# EAGLE board VM_Motor_v2.3 (EAGLE 7.0.0)
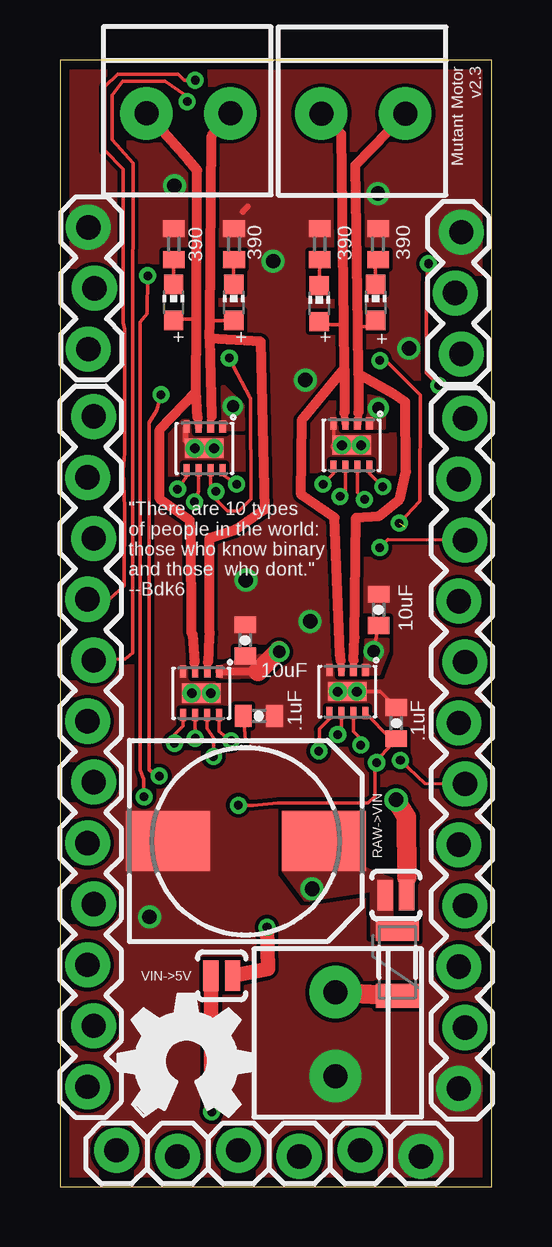
[diagram p0: board, top side]
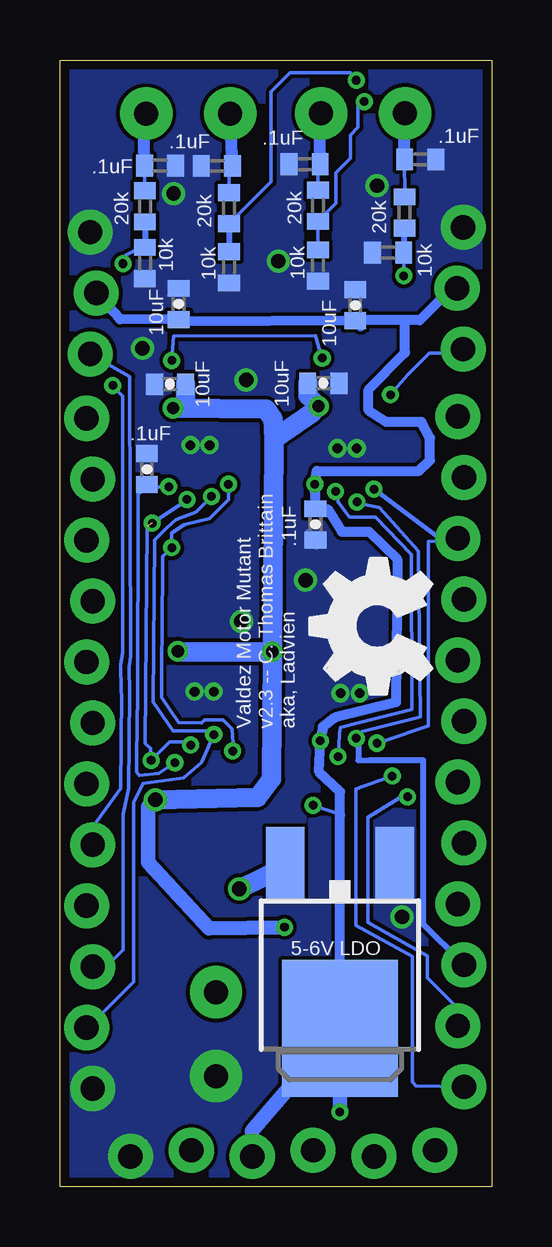
[diagram p1: board, bottom side, seen from below]

Size 18 x 46.97 mm. Coordinates in mm from the lower left corner, seen from the top.
Outline: 0,0 18,0 18,46.97 0,46.97 0,0
Copper layers (1*16): Top 0.0356mm / dielectric 1.5011mm / Bottom 0.0356mm
Design rules "LaenPCBOrder *": minimum track width 6mil, minimum drill 13mil, track to track 6mil, track to pad 6mil, pad to pad 6mil, via to via 6mil, smd to smd 6mil, copper to edge 15mil, drill to drill 6mil, minimum pad ring 7mil, minimum via ring 7mil, stop-mask expansion 3mil, vias tented up to drill 24mil, thermal gap 10mil

## Footprints (pad centres in the part's own frame; a part is rotated, then mirrored left to right if it is on the bottom)
0402-CAP = smd 0.7 x 0.9: 1 -0.65,0; 2 0.65,0
C0402 = smd 0.7 x 0.9: 1 -0.65,0; 2 0.65,0
150CLZ-0810 = smd 3.5 x 2.5: + 3.25,0; - -3.25,0
PTC-1206 = smd 1 x 1.8: 1 -1.4,0; 2 1.4,0
TERMBLOCK_1X2-3.5MM = drill 1 pad 2.184: 1 1.8,0; 2 -1.7,0
1X12_LOCK = drill 1.016 pad 1.88: 1 0,0.127; 2 2.54,-0.127; 3 5.08,0.127; 4 7.62,-0.127; 5 10.16,0.127; 6 12.7,-0.127; 7 15.24,0.127; 8 17.78,-0.127; 9 20.32,0.127; 10 22.86,-0.127; 11 25.4,0.127; 12 27.94,-0.127
1X06_LOCK = drill 1.016 pad 1.88: 1 0,0; 2 2.54,-0.254; 3 5.08,0; 4 7.62,-0.254; 5 10.16,0; 6 12.7,-0.254
1X03_LOCK = drill 1.016 pad 1.88: 1 0,0.127; 2 2.54,-0.127; 3 5.08,0.127
CHIP-LED0603 = smd 0.8 x 0.8: A 0,-0.75; C 0,0.75
R0402 = smd 0.7 x 0.9: 1 -0.65,0; 2 0.65,0
SJ_2S-NO = smd 0.635 x 1.27: 1 -0.45,0; 2 0.45,0
DPAK = smd 1.6 x 3: 1 -2.28,-5.31; 3 2.28,-5.31 | smd 4.826 x 5.715: 4 0,1.588
QFN8 = smd 0.28 x 0.5: P$1 -0.75,-0.9; P$2 -0.25,-0.9 | smd 0.25 x 0.5: P$3 0.25,-0.9; P$4 0.75,-0.9; P$5 0.75,0.9; P$6 0.25,0.9; P$7 -0.25,0.9; P$8 -0.75,0.9 | smd 1.6 x 0.8: P$9 0,0 | drill 0.4 pad 0.6: P$10 0.4,0; P$11 -0.4,0

## Placement (x,y rotation side)
C1  .1uF  [0402-CAP]  8.3,19.63 0 top
C2  .1uF  [0402-CAP]  14.03,19.32 90 top
C3  100nF  [C0402]  13.82,42.57 0 bottom
C4  100nF  [C0402]  11.45,42.55 180 bottom
C5  100nF  [C0402]  7.79,42.63 180 bottom
C6  100nF  [C0402]  2.98,42.82 0 bottom
C7  1000uF  [150CLZ-0810]  7.75,14.41 0 top
C8  .1uF  [0402-CAP]  7.35,27.61 270 bottom
C10  10uF  [0402-CAP]  7.73,22.78 90 top
C11  10uF  [0402-CAP]  13.29,24.05 90 top
C13  10uF  [0402-CAP]  5.68,36.75 90 bottom
C14  10uF  [0402-CAP]  13.05,36.8 90 bottom
C16  10uF  [0402-CAP]  7.01,33.5 0 bottom
C17  .1uF  [0402-CAP]  14.37,29.92 90 bottom
C20  10uF  [0402-CAP]  13.41,33.46 180 bottom
F1  PTCSMD  [PTC-1206]  14.07,9.36 90 top
FRAME1  FRAME-LEDGER  [CREATIVE_COMMONS]  20.82,-8.55 0 top  (outside the outline)
J1  [TERMBLOCK_1X2-3.5MM]  12.7,44.74 180 top
J3  [TERMBLOCK_1X2-3.5MM]  11.49,6.31 90 top
J4  [TERMBLOCK_1X2-3.5MM]  5.41,44.75 180 top
JP1  M12LOCK  [1X12_LOCK]  1.28,4.17 90 top
JP2  M12LOCK  [1X12_LOCK]  16.76,4.09 90 top
JP3  [1X06_LOCK]  2.36,1.52 0 top
JP4  [1X03_LOCK]  1.31,34.92 90 top
JP5  [1X03_LOCK]  16.61,39.8 270 top
LED1  BLUE  [CHIP-LED0603]  7.25,36.87 0 top
LED2  GREEN  [CHIP-LED0603]  4.74,36.87 0 top
LED3  BLUE  [CHIP-LED0603]  13.17,36.87 0 top
LED4  GREEN  [CHIP-LED0603]  10.81,36.82 0 top
R1  390  [R0402]  7.26,39.29 270 top
R2  390  [R0402]  4.75,39.29 270 top
R3  390  [R0402]  13.27,39.29 270 top
R4  390  [R0402]  10.83,39.29 270 top
R5  20k  [R0402]  7.24,40.89 90 bottom
R6  10k  [R0402]  7.24,38.4 90 bottom
R7  20k  [R0402]  3.63,40.61 90 bottom
R8  10k  [R0402]  4.32,38.94 0 bottom
R9  20k  [R0402]  14.45,40.87 90 bottom
R10  10k  [R0402]  14.45,38.51 90 bottom
R11  20k  [R0402]  10.95,40.79 90 bottom
R12  10k  [R0402]  10.95,38.33 90 bottom
RAW->VIN  SOLDERJUMPERNO  [SJ_2S-NO]  14.01,12.16 0 top
U1  V_REG_MC33269DT  [DPAK]  6.32,8.19 180 bottom
U$1  DRV8837  [QFN8]  5.89,20.57 180 top
U$2  DRV8837  [QFN8]  6.03,30.78 180 top
U$3  DRV8837  [QFN8]  12.16,30.91 180 top
U$4  DRV8837  [QFN8]  11.99,20.64 180 top
U$6  [OSHW_FILLX200_NOTEXT]  2.43,2.95 0 top
U$7  [OSHW_FILLX200_NOTEXT]  2.49,20.53 90 bottom
VIN->5V  SOLDERJUMPERNO  [SJ_2S-NO]  6.75,8.8 0 top

## Library data of the parts
C1 C2 C8 C10 C11 C13 C14 C16 C17 C20 = SparkFun-Capacitors
C3-C7 R1-R12 = resistor
F1 = SparkFun-PowerIC; PROD_ID: RES-11150
FRAME1 = SparkFun-Aesthetics
J1 J3 J4 = microbuilder
JP1-JP5 = SparkFun-Connectors
LED1-LED4 = led
RAW->VIN VIN->5V = SparkFun-Retired
U1 = SparkFun-PowerIC
U$1-U$4 = bt_motordriver
U$6 U$7 = ohw-logo

## Nets
+5V: C1.1 C2.1 C8.1 C13.1 C14.1 C17.1 JP3.4 JP4.2 JP5.2 U1.4 U$1.P$8 U$2.P$8 U$3.P$8 U$4.P$8 VIN->5V.1
CTS_RES: JP3.5
DTR_SEL: JP3.1
GND: C1.2 C2.2 C3.2 C4.2 C5.2 C6.2 C7.- C8.2 C10.2 C11.2 C13.2 C14.2 C16.2 C17.2 C20.2 J3.2 JP2.1 JP3.6 JP4.3 JP5.1 R1.1 R2.1 R3.1 R4.1 R6.1 R8.1 R10.1 R12.1 U1.1 U$1.P$4 U$1.P$9 U$1.P$10 U$1.P$11 U$2.P$4 U$2.P$9 U$2.P$10 U$2.P$11 U$3.P$4 U$3.P$9 U$3.P$10 U$3.P$11 U$4.P$4 U$4.P$9 U$4.P$10 U$4.P$11
HM-RX: JP2.12
HM-TX: JP2.11
IO20: JP2.8
IO_02: JP2.9
IO_05-SDA: JP1.11
IO_06: JP1.7
IO_07: JP1.6
IO_08: JP1.5
IO_08-SCL: JP1.12
IO_09: JP1.4
IO_10: JP1.8 R5.1 R6.2
IO_011: JP1.1 JP4.1
IO_11: JP1.9 R11.1 R12.2
IO_13: JP2.3 JP5.3
IO_14: JP2.4
IO_15: JP2.7
IO_110: JP1.2 R7.1 R8.2
IO_111: JP2.5 R9.1 R10.2
MOTOR1_DIR: JP1.10 U$1.P$5 U$2.P$5
MOTOR1_PWM: JP1.3 U$1.P$6 U$2.P$6
MOTOR2_DIR: JP2.10 U$3.P$5 U$4.P$5
MOTOR2_PWM: JP2.2 U$3.P$6 U$4.P$6
MOUT1_A: C5.1 J4.2 LED1.A R5.2 U$1.P$2 U$2.P$2
MOUT1_B: C6.1 J4.1 LED2.A R7.2 U$1.P$3 U$2.P$3
MOUT2_A: C3.1 J1.2 LED3.A R9.2 U$3.P$2 U$4.P$2
MOUT2_B: C4.1 J1.1 LED4.A R11.2 U$3.P$3 U$4.P$3
N$1: LED2.C R2.2
N$2: LED4.C R4.2
N$3: LED1.C R1.2
N$4: LED3.C R3.2
N$13: F1.1 J3.1
RAW: C7.+ F1.2 RAW->VIN.1 U1.3
RX: JP3.3
SLEEP: JP2.6 U$1.P$7 U$2.P$7 U$3.P$7 U$4.P$7
TX: JP3.2
VIN: C10.1 C11.1 C16.1 C20.1 RAW->VIN.2 U$1.P$1 U$2.P$1 U$3.P$1 U$4.P$1 VIN->5V.2

## Tracks (layer width: path | path; a pad name or v marks a point on that pad's centre or on a via)
+5V  (via drill 0.36, 0.36 pad 0.36)
  Top 0.152: U$2.P$8 6.78,29.7 v7.37,29.29 | U$3.P$8 12.91,29.74 v13.46,29.18 | U$1.P$8 6.64,18.98 v7.14,18.59 7.73,18.59 C1.1 | U$4.P$8 13.81,18.68 C2.1 13.41,17.98 v13.21,17.68 13.13,17.58 13.13,16.28 12.85,16 9.09,16 8.05,15.9 v7.44,15.9
  Top 0.61: VIN->5V.1 6.3,3.15 v6.33,3.12
  Bottom 0.152: v7.37,29.29 7.16,29.29 | v7.37,29.29 7.37,29.06 | v7.37,29.29 7.37,28.98 | 14.53,29.17 C17.1 14.73,28.86 14.76,19.91 14.78,19.84 14.81,17.3 14.71,17.14 13.89,17.22 v13.21,17.68 | 14.53,29.17 14.7,29.17 | 14.53,29.17 13.48,29.17 v13.46,29.18 | v7.37,29.29 7.37,28.27 7.32,28.22 6.83,28.25 | JP4.2 1.66,37.46 | 5.67,36.12 C13.1 | 12.74,36.07 C14.1 | 7.39,29.26 v7.37,29.29 | v7.44,15.9 6.37,15.54 6.32,15.49
  Bottom 0.406: U1.4 6.32,15.49 6.32,16.48 7.19,17.3 v7.14,18.59 7.14,18.67 7.04,19.18 6.53,19.56 3.99,20.19 3.94,26.16 5.11,27.3 6.25,27.3 6.83,28.25 | 7.37,28.98 C8.1 | 1.66,37.46 3,36.12 3.61,36.12 | 3.61,36.12 5.67,36.12 | 12.74,36.07 C13.1 5.46,35.88 | C14.1 15.49,36.16 JP5.2 | 7.39,29.26 7.29,29.84 3.02,29.84 2.56,30.28 2.56,31.22 2.92,31.88 4.39,31.88 5.13,32.36 5.13,33.22 3.63,34.75 3.61,34.77 3.61,36.12
  Bottom 0.61: JP3.4 9.98,2.33 U1.4 v6.33,3.12
GND  (via drill 0.6)
  Top 0.152: 13.97,20.19 14.03,20.14 C2.2 13.36,20.64 U$4.P$11 | 11.43,30.91 11.43,31.79 U$3.P$4
  Top 0.254: U$2.P$4 5.24,31.59 5.24,31.11 5.56,30.8 U$2.P$10 | U$3.P$10 11.43,30.8 11.43,30.91 | 7.62,40.64 7.84,40.87
  Bottom 0.254: 7.3,26.99 C8.2 | 7.3,26.67 C8.2 | 7.62,27.3 C8.2
  other vias: 3.73,11.25 7.76,25.29 8.89,38.58 13.26,41.4 4.78,41.73 14.55,34.95 10.24,33.63 10.43,23.57
  pour Bottom (rank 6, no thermals): 18.1,46.8 18.3,46.8 18.3,-0.9 0.2,-0.9 0.2,47 18.1,47
  pour Top (rank 6, no thermals): 18.1,46.8 18.3,46.8 18.3,-0.9 0.2,-0.9 0.2,47 18.1,47
IO_10  (via drill 0.36)
  Top 0.152: JP1.8 2.72,22 3.02,22.25 3.02,35.48 3.05,42.67 2.18,43.64 2.18,45.49 2.62,46.08 4.39,46.08 5.21,45.52 v5.31,45.24
  Bottom 0.152: R6.2 R5.1 6.49,41 6.49,42.28 5.89,42.88 5.89,43.84 5.56,44.17 5.56,45.29 v5.31,45.24
IO_011  (via drill 0.36, 0.36 pad 0.36)
  Top 0.152: v4.22,33.02 4.04,32.36 3.71,31.85 3.71,17.37 v4.14,17.12
  Bottom 0.152: JP1.1 3.15,4.22 3.3,4.37 3.3,9.6 5.66,10.9 5.66,16.59 v4.14,17.12 | v4.22,33.02 3.48,33.86 2.59,34.75 1.35,34.75 JP4.1
IO_11  (via drill 0.36)
  Top 0.152: JP1.9 2.11,24.54 2.67,25.04 2.69,28.3 2.64,29.84 2.69,30.58 2.69,35.76 2.64,35.99 2.64,42.42 1.85,43.2 1.85,45.85 2.41,46.38 4.93,46.38 5.18,46.13 v5.64,46.13
  Bottom 0.152: R11.1 9.2,41.9 9.2,45.64 8.41,46.43 5.89,46.43 5.84,46.38 v5.64,46.13
  Bottom 0.254: R12.2 10.95,39.05 10.95,40.01 R11.1 10.79,40.16 10.64,40.32
IO_13
  Bottom 0.152: JP2.3 16.05,9.2 15.37,9.88 15.37,15.52 15.14,16.61 15.09,20.57 15.11,21.69 15.06,22.1 15.09,33.78 JP5.3
IO_110  (via drill 0.36)
  Top 0.152: v3.5,16.26 3.48,16.99 3.35,17.37 3.35,36.04 3.63,36.4 v3.66,37.97
  Bottom 0.152: JP1.2 1.51,7.55 2.67,8.71 2.67,9.63 4.34,10.57 5.16,11.02 5.16,15.39 3.58,16.38 v3.5,16.26 | v3.66,37.97 R8.2
  Bottom 0.254: R8.2 3.65,39.71 3.65,39.85 R7.1
IO_111  (via drill 0.36)
  Top 0.152: v15.8,33.4 15.29,33.91 15.29,37.62 v15.37,38.48
  Bottom 0.152: R10.2 14.54,39.22 15.37,38.77 v15.37,38.48 | JP2.5 16.51,15.17 15.47,16.61 15.42,20.5 15.44,20.68 15.47,21.77 15.39,22.25 15.39,32.97 v15.8,33.4
  Bottom 0.254: R10.2 14.45,39.21 14.45,40.16 R9.1
MOTOR1_DIR  (via drill 0.36)
  Top 0.152: U$1.P$5 5.14,19.22 4.78,18.85 v4.78,18.49 | U$2.P$5 5.28,29.61 v4.9,29.08
  Bottom 0.152: v4.78,18.49 4.57,18.54 4.5,18.59 2.64,19.2 2.64,26.9 1.66,26.92 JP1.10
  Bottom 0.203: JP1.10 2.23,27.08 v4.9,29.08
MOTOR1_PWM  (via drill 0.36)
  Top 0.152: U$1.P$6 5.64,18.75 v5.64,18.69 | U$2.P$6 5.78,28.99 v5.61,28.55
  Bottom 0.152: v5.64,18.69 5.38,18.97 2.97,19.58 3.05,26.49 4.67,28.32 5.51,28.47 5.54,28.47 v5.61,28.55
  Bottom 0.254: JP1.3 1.27,9.37 2.86,10.95 2.86,17.79 5.08,17.79 5.56,17.78 5.56,18.71 v5.64,18.69
MOTOR2_DIR  (via drill 0.36 pad 0.36)
  Top 0.152: U$4.P$5 11.24,19.49 10.82,19.07 10.82,18.11 v10.79,18.16 | U$3.P$5 11.41,29.72 v10.97,29.29 | JP2.10 13.67,26.98 v13.34,26.64
  Bottom 0.152: v10.97,29.29 10.97,28.65 11.76,27.86 12.8,27.61 13.34,27.25 v13.34,26.64 13.72,26.26 13.74,22.99 13.77,22.1 13.77,20.4 13.06,19.36 12.09,19.33 11.96,19.46 11.2,19.46 10.82,19.07 10.77,18.21 v10.79,18.16
MOTOR2_PWM  (via drill 0.36 pad 0.36)
  Top 0.152: U$4.P$6 11.74,19 v11.58,18.85 | U$3.P$6 11.91,29 v11.68,28.78
  Bottom 0.152: JP2.2 16.79,6.68 14.94,8.53 14.94,16.03 14.53,16.82 12.85,17.04 12.09,17.68 11.61,18.77 11.58,18.8 v11.58,18.85 11.89,19 13.28,19 14.12,20.22 14.05,26.95 13.54,27.48 13.16,27.81 12.32,28.12 v11.68,28.78
MOUT1_A
  Top 0.152: 6.17,21.86 U$1.P$2 | LED1.A 7.23,36.1 6.25,36.1
  Top 0.305: 6.33,32.11 6.27,31.93 U$2.P$2
  Top 0.406: 6.25,35.36 8.38,35.23 8.56,28.25 7.32,27.41 6.25,27.05 6.25,23.09 6.22,22.91 6.17,21.86 | 6.25,35.36 6.33,32.11 | 6.25,35.36 6.25,36.1 6.33,43.81 J4.2
  Bottom 0.152: R5.2 7.24,42.6 C5.1
  Bottom 0.406: 7.17,44.69 J4.2
  Bottom 0.508: C5.1 7.17,44.69
MOUT1_B
  Top 0.152: 5.61,21.84 U$1.P$3 | LED2.A 4.74,36.17 5.69,36.17
  Top 0.305: 5.74,32.05 5.79,31.67 U$2.P$3
  Top 0.406: J4.1 5.33,42.82 5.73,42.38 5.69,36.17 5.67,33.15 | 5.61,21.84 5.54,23.01 5.49,23.06 5.47,27.36 5.41,27.79 4.17,28.68 4.17,31.56 5.67,33.15 | 5.74,32.05 5.67,33.15
  Bottom 0.152: C6.1 3.61,41.28 R7.2
  Bottom 0.406: 3.64,44.72 J4.1
  Bottom 0.508: C6.1 3.64,44.72
MOUT2_A
  Top 0.152: 12.45,33.88 12.39,34.76 | LED3.A 13.04,35.86 12.42,35.86
  Top 0.305: U$4.P$2 12.24,21.79 12.24,21.95 | 12.45,32.26 12.42,31.82 U$3.P$2
  Top 0.406: 12.24,21.95 12.29,22.91 12.34,27.89 13.31,27.96 14.17,28.68 14.43,29.79 14.4,32.72 13.92,33.05 12.45,33.88 | 12.45,33.88 12.45,32.26 | 12.45,33.88 12.42,35.86 12.32,42.58 J1.2
  Bottom 0.152: C3.1 14.47,41.54 R9.2
  Bottom 0.406: 14.51,44.63 J1.2
  Bottom 0.508: C3.1 14.51,44.63
MOUT2_B
  Top 0.152: 11.86,34.11 11.89,34.58 | LED4.A 10.9,35.95 11.84,35.95
  Top 0.305: U$4.P$3 11.71,21.92 | 11.86,32.26 11.89,31.83 U$3.P$3
  Top 0.406: 11.71,21.92 11.68,22.2 11.46,27.89 10.06,28.85 10.08,31.95 11.86,34.11 | 11.86,34.11 11.86,32.26 | 11.86,34.11 11.84,35.95 11.73,43.88 J1.1
  Bottom 0.152: R11.2 10.95,42.56 C4.1
  Bottom 0.406: J1.1
  Bottom 0.508: C4.1 J1.1
N$1
  Top 0.152: LED2.C 4.74,38.27 R2.2
N$2
  Top 0.152: LED4.C 10.84,38.49 R4.2
N$3
  Top 0.152: LED1.C 7.23,38.78 R1.2
N$4
  Top 0.152: LED3.C 13.14,38.48 R3.2
N$13
  Top 0.813: J3.1 F1.1
RAW  (via drill 0.61 pad 0.61)
  Bottom 0.254: U1.3 8.6,13.35
  Bottom 0.813: 8.6,13.35 v10.52,12.42
  pour Top (no thermals): 13.82,10.49 13.82,12.8 12.95,13.13 12.8,13.21 9.32,13.21 10.24,11.99 13,12.4 13.03,10.49
SLEEP  (via drill 0.36, 0.36 pad 0.36)  (1 unrouted)
  Top 0.152: U$1.P$7 6.14,19.1 6.4,18.72 v6.4,17.93 | U$2.P$7 6.28,29.26 v6.5,28.98 6.5,28.65 6.99,28.17 7.47,28.17 7.98,28.68 7.95,32.77 7.95,32.87 7.92,32.89 v7.06,34.54 | U$4.P$7 12.24,18.98 12.55,18.67 | U$3.P$7 12.41,28.94 v12.7,28.65 | JP2.6 15.21,16.82 v14.2,17.78 | 12.55,18.67 v12.55,18.41 | 12.55,18.67 12.57,18.64 | v14.15,27.66 15.01,28.57 15.04,32.99 13.59,34.44 v13.34,34.44
  Bottom 0.152: 6.4,17.91 v6.4,17.93 6.38,17.96 6.35,18.9 6.3,19.15 5.56,19.33 3.33,19.89 3.35,26.36 4.85,27.91 5.92,27.91 6.38,28.52 v6.5,28.98 | v12.7,28.65 12.7,28.63 14.37,27.52 14.45,18.48 14.22,18.26 v14.2,17.78 13.44,18.54 12.68,18.54 v12.55,18.41 | v13.34,34.44 13.26,35.46 7.34,35.48 7.06,34.44 v7.06,34.54
VIN  (via drill 0.36, 0.51 pad 0.51, 0.61 pad 0.61)
  Top 0.152: C11.1 13.11,22.5 v13.08,22.33 | RAW->VIN.2 14.33,12.29 14.61,12.57 14.48,12.9
  Top 0.305: U$1.P$1 8.27,21.48
  Top 0.406: 9.14,22.25 v9.14,22.3 9.14,22.35
  Top 0.61: VIN->5V.2 8.67,9.09 v8.64,10.82
  Top 0.813: 8.27,21.48 9.14,22.35 | 14.48,12.9 14.45,15.42 v14.02,16.13
  Bottom 0.152: v13.28,32.46 12.75,32.59
  Bottom 0.61: v8.64,10.82 11.79,10.77 14.33,13.51 14.33,15.82 v14.02,16.13 | v7.21,32.54 7.47,32.28
  Bottom 0.813: v14.02,16.13 9.75,16.23 9.17,16.99 v9.14,22.3 | v9.14,22.3 9.07,31.16 | v13.28,32.46 9.4,32.41 9.12,32 9.07,31.16 | 12.75,32.59 C20.1 | v9.14,22.3 13.06,22.3 v13.08,22.33 | 7.47,32.28 9.07,31.16 | v7.21,32.54 7.67,32.99 C16.1
  pour Top (no thermals): 6.83,31.6 7.65,31.6 7.62,32.54 6.81,33.35
  pour Top (no thermals): 8.36,21.29 8.41,22.12 6.73,21.67 6.71,21.26
  pour Top (no thermals): 12.73,21.41 13.28,21.41 13.67,22.38 13.67,22.78 12.78,22.76
  pour Top (no thermals): 12.8,31.67 13.51,31.65 13.49,32.79 12.78,32.97

## Text on the board
tNames: Mutant Motor / v2.3 | 390 | 390 | 390 | 390 | + | + | + | + | 10uF | "There are 10 types / of people in the world: / those who know binary / and those who dont." / --Bdk6 | 10uF | .1uF | .1uF
bNames: .1uF | .1uF | .1uF | .1uF | 20k | 20k | 20k | 10k | 20k | 10k | 10k | 10k | 10uF | 10uF | 10uF | 10uF | .1uF | .1uF | Valdez Motor Mutant / v2.3 -- C. Thomas Brittain / aka, Ladvien | 5-6V LDO